# Altium PCB torqueDriver.PcbDoc
Units mm, origin at the board's own origin, x right, y up, seen from the top; angles counter-clockwise.
Board outline 152.4 x 101.6 mm, 2 copper layers (Top Layer, Bottom Layer); 37 components, 25 nets, 107 pads, 0 vias.
Unrouted connection lines stored in the file: 78.
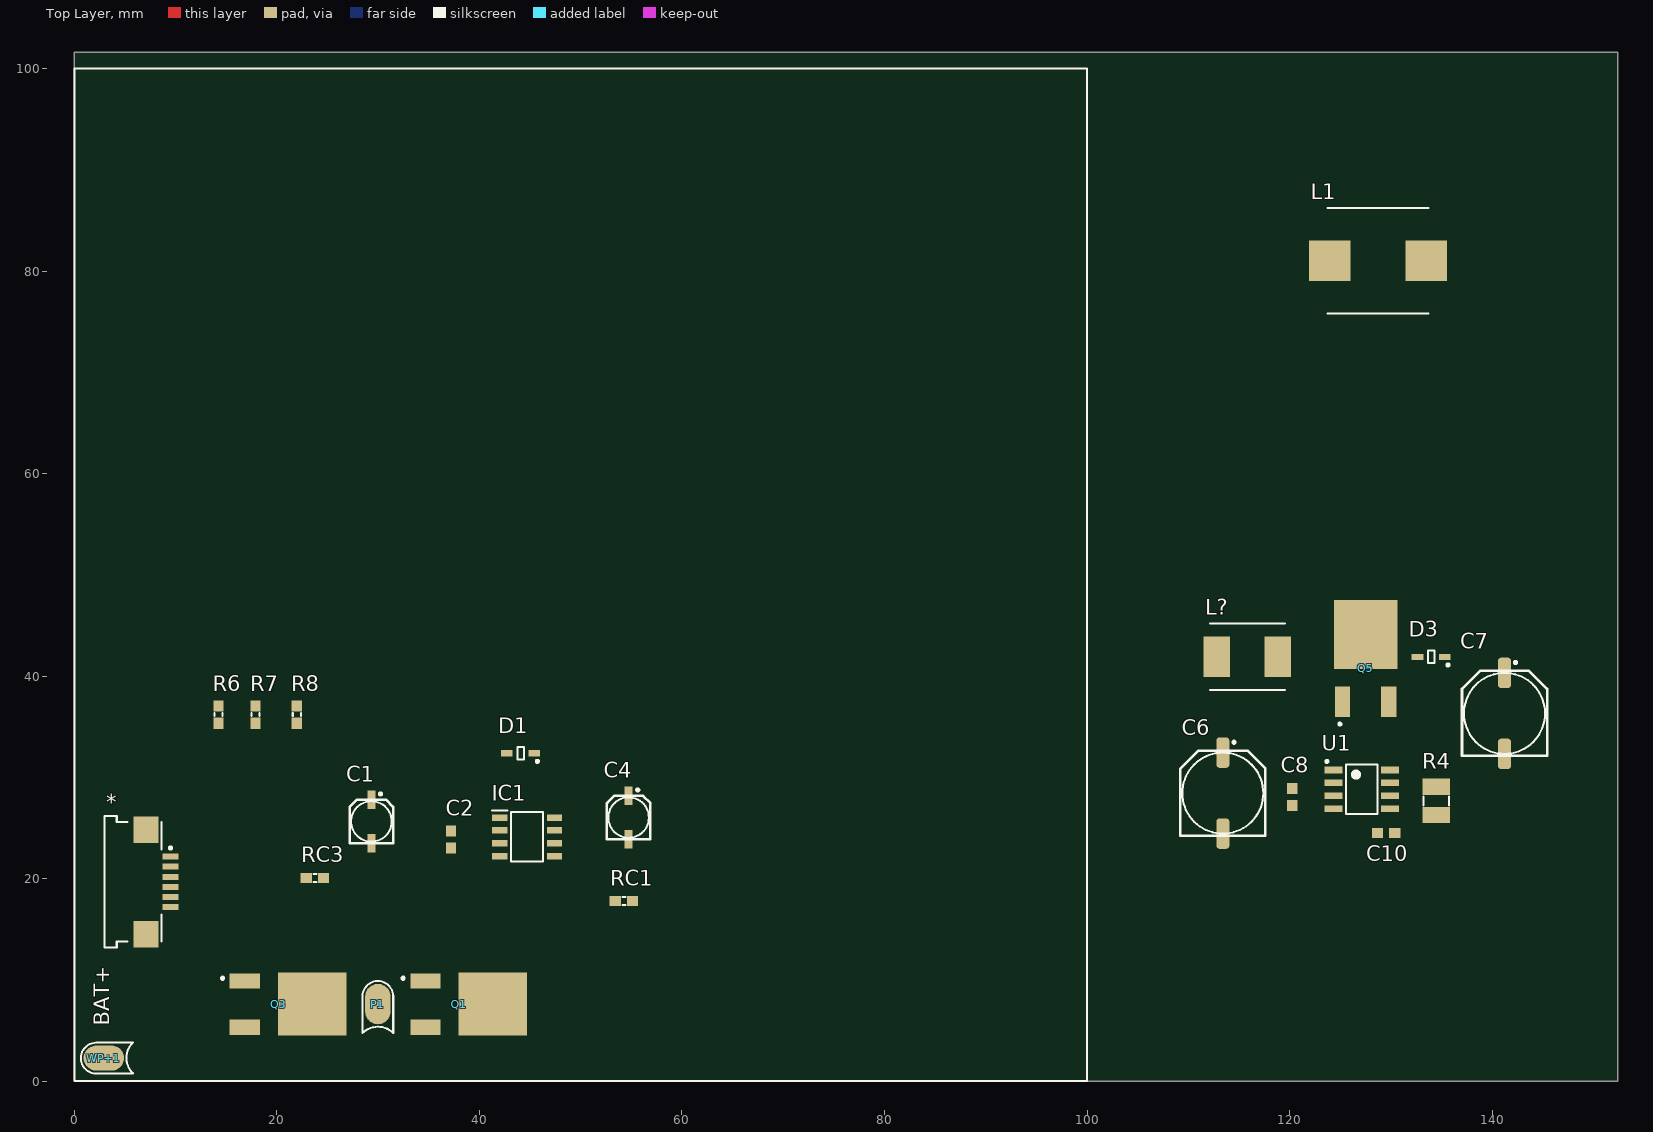
[diagram p0: Top Layer view]
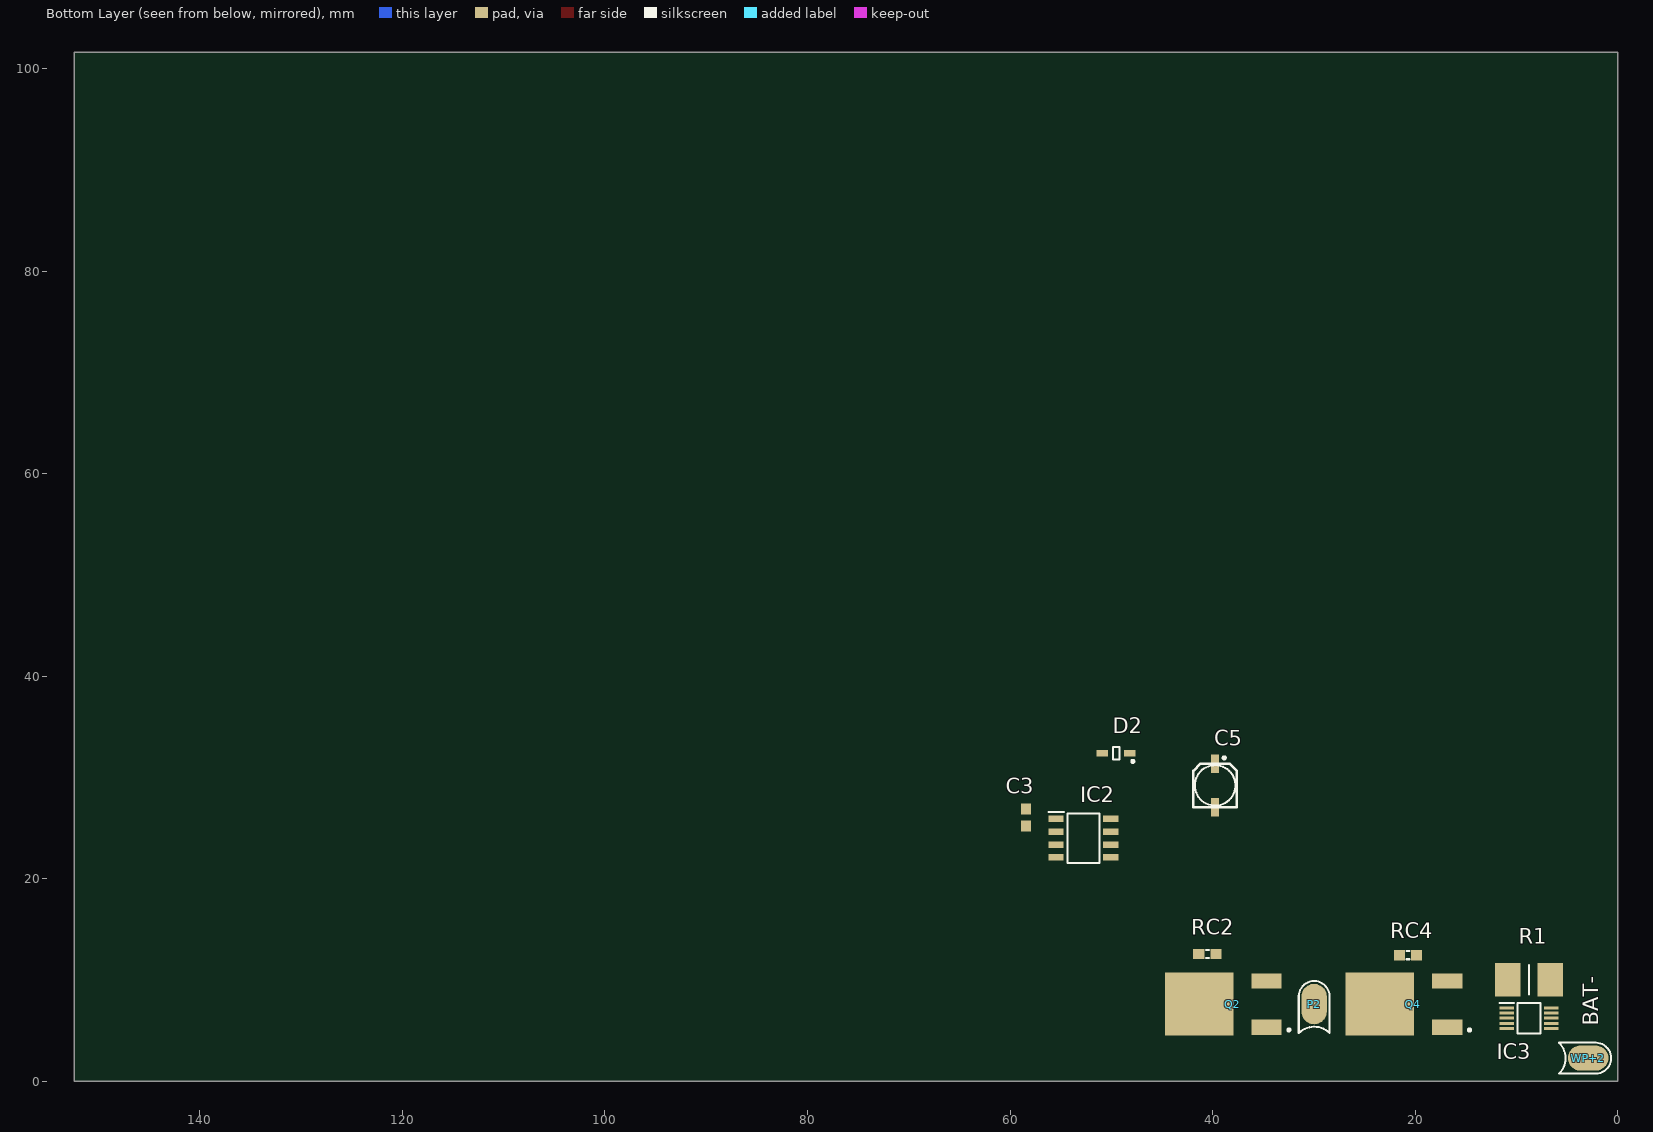
[diagram p1: Bottom Layer view, seen from below]

## Layer stack, top to bottom
Top Solder: solder mask 0.0102, Solder Resist, Dk 3.5
Top Layer: signal copper 0.0356
Dielectric 1: dielectric 0.32, FR-4, Dk 4.8
Bottom Layer: signal copper 0.0356
Bottom Solder: solder mask 0.0102, Solder Resist, Dk 3.5

## Board outline
0,0 152.4,0 152.4,101.6 0,101.6

## Design rules (kind name [scope] priority, off if disabled: settings)
Clearance [All] p1: gap=0.178 ignorepadtopadclearanceinfootprint=FALSE
PolygonConnect [All] p1: connectstyle=Relief reliefconductorwidth=0.254 reliefentries=4 polygonreliefangle="90 Angle" airgapwidth=0.254
RoutingVias [All] p1: holewidth=0.711 width=1.27 viastyle="Through Hole" minholewidth=0.711 minwidth=1.27 maxholewidth=0.711 maxwidth=1.27
SolderMaskExpansion [All] p1: expansion=0.102
Width [All] p1: maxlimit=0.254 minlimit=0.254 preferedwidth=0.254
30 further rules are at their usual default settings.

## Components (designator, comment, footprint, x,y, rotation, side; value= is the part's Value field where it differs from the comment)
* "HeaderFFC6p" FH12-6S-1.0SH 7.874,19.685 r270 top
C1 "47uF" CAPS4 29.337,25.654 r270 top
C2 "226" CAPC1608[0603] 37.211,23.876 r270 top
C3 "226" CAPC1608[0603] 58.42,26.035 r270 bottom
C4 "10uF" CAPS4 54.737,26.035 r270 top
C5 "10uF" CAPS4 39.751,29.21 r270 bottom
C6 "330uF" CAPS8 113.411,28.448 r270 top
C7 "330uF" CAPS8 141.224,36.322 r270 top
C8 "104" CAPC1608[0603] 120.269,28.067 r90 top
C10 "104" CAPC1608[0603] 129.54,24.511 r0 top
D1 "1N5819" SOD-323 44.069,32.385 r0 top
D2 "1N5819" SOD-323 49.53,32.385 r180 bottom
D3 "1N5819" SOD-323 133.985,41.91 r0 top
IC1 "IR2104S" SOIC127P600X175-8N 44.704,24.13 r0 top
IC2 "IR2104S" SOIC127P600X175-8N 52.75,24.003 r180 bottom
IC3 "INA381A2IDGSR" SOP50P490X110-10N 8.763,6.223 r180 bottom
L1 "100uH" WHC1040 128.727,81.026 r0 top
L? "22uH" WHC0630 115.824,41.91 r0 top
P1 "Motor+" WirePadSingleSide 57.322,7.62 r0 top
P2 "Motor-" WirePadSingleSide 2.622,7.62 r180 bottom
Q1 "NCE6075K 60V 75A" TO-252 37.973,7.62 r270 top
Q2 "NCE6075K 60V 75A" TO-252 37.973,7.62 r90 bottom
Q3 "NCE6075K 60V 75A" TO-252 20.142,7.62 r270 top
Q4 "NCE6075K 60V 75A" TO-252 20.142,7.62 r90 bottom
Q5 "NCE6020AK 60V 20A" TO-252 127.508,40.767 r0 top
R1 "R005 3W" R2512 8.763,10.033 r0 bottom
R4 "0.05" RESC3225[1210] 134.493,27.686 r270 top value=0.05R
R6 "47k" RESC1608[0603] 14.224,36.195 r270 top
R7 "47k" RESC1608[0603] 17.907,36.195 r270 top
R8 "47k" RESC1608[0603] 21.971,36.195 r270 top
RC1 "33R" RESC1608[0603] 54.268,17.78 r0 top
RC2 "33R" RESC1608[0603] 40.513,12.573 r180 bottom
RC3 "33R" RESC1608[0603] 23.749,20.066 r180 top
RC4 "33R" RESC1608[0603] 20.701,12.446 r180 bottom
U1 "MAX1771" SOIC8 127.127,28.829 r0 top
WP+1 "BAT+" WirePadSingleSide 2.921,29.636 r90 top
WP+2 "BAT-" WirePadSingleSide 2.921,-25.064 r270 bottom

## Footprints (in the part's own frame and the unit in brackets; to place one, negate y for a bottom-side part, rotate by r counter-clockwise, add the part's x,y. Pads: shape width x height; smd on the part's side, far side on the other; paste and mask are expansions set on the pad)
CAPC1608[0603] [mm] "Chip Capacitor, 2-Leads, Body 1.60x0.80mm, IPC Medium Density"
  rect 1.1x1 smd: 1(-0.85,0) 2(0.85,0)
  body extent -0.88,-0.48 0.87,0.47, height 0.85
CAPS4 [mm] "Solid Electorlytic Capacitor, B-type Footprint, 4mm Diameter, 5.5mm Height"
  rect 1.8x0.8 smd: 1(-2.15,0) 2(2.15,0)
  silkscreen extent -2.85,-2.15 2.15,2.15, body extent -2.29,-2.16 2.31,2.14, height 5.2
CAPS8 [mm] "Solid Electorlytic Capacitor, G-type Footprint, 8mm Diameter, 10mm Height"
  rrect50% 3x1.3 smd: 1(-4,0) 2(4,0)
  silkscreen extent -5.15,-4.2 4.2,4.2, body extent -3.5,-3.3 3.5,3.3, height 7.7
FH12-6S-1.0SH [mm] "Connector; FH12 Series; 6 Position; 1.0mm Spaced Bottom Eccentric Contact"
  rect 2.6x2.5 smd: 0(-5.156,-0.787) 0(5.156,-0.787)
  rect 0.6x1.6 smd: 1(-2.5,1.625) 2(-1.5,1.625) 3(-0.5,1.625) 4(0.5,1.625) 5(1.5,1.625) 6(2.5,1.625)
  silkscreen extent -6.5,-4.88 6.48,1.75, body extent -6.5,-4.89 6.5,1.91, height 2.8
R2512 [mm]
  rect 2.5x3.3 smd: 1(-2.1,0) 2(2.1,0)
  silkscreen extent 0,-1.45 0,1.45, body extent -3.15,-1.55 3.15,1.55, height 0.75
RESC1608[0603] [mm] "Chip Resistor, 2-Leads, Body 1.60x0.82mm, IPC Medium Density"
  rect 1.1x1 smd: 1(-0.85,0) 2(0.85,0)
  silkscreen extent -0.15,-0.4 0.15,0.4, body extent -0.8,-0.4 0.8,0.4, height 0.45
RESC3225[1210] [mm] "Chip Resistor, 2-Leads, Body 3.20x2.49mm, IPC Medium Density"
  rect 1.6x2.7 smd: 1(-1.4,0) 2(1.4,0)
  silkscreen extent -0.45,-1.25 0.45,1.25, body extent -1.68,-1.32 1.68,1.32, height 0.71
SOD-323 [mm] "SOD Diode;1.65mm W X 1.24mm L X 1.16mm H body"
  rect 1.15x0.6 smd: A(-1.35,0) K(1.35,0)
  silkscreen extent -0.33,-0.92 1.78,0.6, body extent -1.3,-0.65 1.3,0.65, height 1
SOIC8 [mm] "SOIC,1.27mm pitch;8 pin,3.90mm W X 4.88mm L X 1.73mm H body"
  rect 1.8x0.65 smd: 1(-2.8,1.905) 2(-2.8,0.635) 3(-2.8,-0.635) 4(-2.8,-1.905) 5(2.8,-1.905) 6(2.8,-0.635) 7(2.8,0.635) 8(2.8,1.905)
  silkscreen extent -3.57,-2.45 1.58,2.87, body extent -3.11,-2.45 3.11,2.45, height 1.75
SOIC127P600X175-8N [mm]
  rect 1.525x0.65 smd: 1(-2.712,1.905) 2(-2.712,0.635) 3(-2.712,-0.635) 4(-2.712,-1.905) 5(2.712,-1.905) 6(2.712,-0.635) 7(2.712,0.635) 8(2.712,1.905)
  silkscreen extent -3.47,-2.45 1.6,2.58, body extent -3,-2.45 3,2.45, height 1.75
SOP50P490X110-10N [mm]
  rect 1.4x0.3 smd: 1(-2.2,1) 2(-2.2,0.5) 3(-2.2,0) 4(-2.2,-0.5) 5(-2.2,-1) 6(2.2,-1) 7(2.2,-0.5) 8(2.2,0) 9(2.2,0.5) 10(2.2,1)
  silkscreen extent -2.9,-1.5 1.15,1.5, body extent -2.46,-1.5 2.46,1.5, height 1.1
TO-252 [mm]
  rect 1.5x3 smd: 1(-2.286,-3.3) 3(2.286,-3.3)
  rect 6.25x6.8 smd: 2(0,3.353)
  silkscreen extent -2.6,-5.55 -2.5,-5.45, body extent -3.3,-4.16 3.3,5.44, height 2.3
WHC0630 [mm] "7.4mm 6.6mm 3mm"
  rect 2.6x4 smd: 1(-3,0) 2(3,0)
  silkscreen extent -3.7,-3.3 3.7,3.3, body extent -3.66,-3.38 3.64,3.22, height 2.8
WHC1040 [mm] "11.6mm 10mm 4mm"
  rect 4.1x4 smd: 1(-4.75,0) 2(4.75,0)
  silkscreen extent -5,-5.2 5,5.2, body extent -5.55,-5 5.6,5, height 4
WirePadSingleSide [mm] "A single-side pad for soldering wire."
  oval 2.5x4 smd: 1(-27.35,0)
  silkscreen extent -28.87,-2.88 -25.83,2.27

## Part data
C1 C6 C7: library part "Cap Solid", "Polarized Capacitor (Radial)", Voltage=25V, Price(RMB)=0.000, Published=8-Jun-2000, Publisher="Altium Limited", Revision="July-2002: Re-released for DXP Platform."
C2 C3 C8 C10: library part "Cap Chip 1", "Chip Capacitor, PSpice Model", Tolerance=Y5V, Voltage=3V, Price(RMB)=0.000, Published=8-Jun-2000, Publisher="Altium Limited", Revision="July-2002: Re-released for DXP Platform."
C4 C5: library part "Cap Solid", "Polarized Capacitor (Radial)", Voltage=50V, Price(RMB)=0.000, Published=8-Jun-2000, Publisher="Altium Limited", Revision="July-2002: Re-released for DXP Platform."
D1 D2 D3: library part "Diode SOD", "MELF Diode", Voltage=1A40V, Imax=500mA, PartNumber=1N5819, Price(RMB)=0.000, Published=8-Jun-2000, Publisher="Altium Limited", Revision="July-2002: Re-released for DXP Platform."
IC1 IC2: "Integrated Circuit", Manufacturer_Name=Infineon, Datasheet Link=http://www.infineon.com/dgdl/ir2104.pdf?fileId=5546d462533600a4015355c7c1c31671, Height=1.75mm, Manufacturer_Part_Number=IR2104S
IC3: library part INA381A1IDGSR, "Integrated Circuit", Manufacturer_Name="Texas Instruments", Mouser Part Number=595-INA381A1IDGSR, Arrow Part Number=INA381A1IDGSR, Arrow Price/Stock=https://www.arrow.com/en/products/ina381a1idgsr/texas-instruments?region=nac, Datasheet Link=https://www.ti.com/lit/gpn/INA381, Height=1.1mm, Manufacturer_Part_Number=INA381A1IDGSR, Mouser Price/Stock=https://www.mouser.co.uk/ProductDetail/Texas-Instruments/INA381A1IDGSR?qs=rkhjVJ6%2F3EJisYwyX9Ekgg%3D%3D
L1 L?: library part L
P1 P2 WP+1 WP+2: library part "Wire Pad", "Wire soldering pad.", Price(RMB)=0.000
Q1 Q2 Q3 Q4 Q5: library part NMOS
R1: library part CR2512, "Resistor", Manufacturer_Name=Bourns, Manufacturer_Part_Number=CR2512-F/-1R00ELF, Mouser Part Number=652-CR2512-F/1R00ELF, Height=0.75mm, Mouser Price/Stock=https://www.mouser.co.uk/ProductDetail/Bourns/CR2512-F-1R00ELF?qs=W%2FMpXkg%252BdQ6b1PcPiGLK9Q%3D%3D
R4 R6 R7 R8 RC1 RC2 RC3 RC4: library part "Res Chip 2p 1", "Chip Resistor, PSpice Model, IPC PCB Library Drawing", Tolerance=5%, Price(RMB)=0.000, Published=8-Jun-2000, Publisher="Altium Limited", Revision="July-2002: Re-released for DXP Platform.", TC1=0, TC2=0
U1: "DC-to-DC Converter Control Circuit", PartNumber=MAX1771, Price(RMB)=0.0

## Nets (pads, with @x,y where several pads share a name; then routed paths per layer and width w, separated by ;. In a path a pad name is that pad's centre, name@x,y a point inside that pad or via, vN(x,y) a via of type N, cw(c..) or ccw(c..) an arc to the next point about the centre after c; other vN are vias at no path point)
12V: C1.1 C2.1 C3.1 C7.1 C8.1 D1.A D2.A D3.K IC1.1 IC2.1 U1.2
+3.3V: *.4 IC3.2 IC3.7
CS: Q5.3 R4.1 U1.8
currentOut: *.6 IC3.9
currentSense: IC3.1 Q3.3 Q4.3 R1.2
EXT: Q5.1 U1.1
GND: *.0 *.5 C1.2 C2.2 C3.2 C6.2 C7.2 C8.2 C10.1 IC1.4 IC2.4 IC3.4 IC3.5 IC3.8 IC3.10 R1.1 R4.2 R6.1 R7.1 R8.1 U1.3 U1.4 U1.6 U1.7 WP+2.1
IN1: *.2 IC1.2 R6.2
IN2: *.1 IC2.2 R7.2
Motor1: C4.2 IC1.6 P1.1 Q1.3 Q3.2
Motor2: C5.2 IC2.6 P2.1 Q2.3 Q4.2
NetC4_1: C4.1 D1.K IC1.8
NetC5_1: C5.1 D2.K IC2.8
NetC10_2: C10.2 U1.5
NetD3_A: D3.A L1.1 Q5.2
NetIC1_5: IC1.5 RC3.1
NetIC1_7: IC1.7 RC1.1
NetIC2_5: IC2.5 RC4.1
NetIC2_7: IC2.7 RC2.1
NetQ1_1: Q1.1 RC1.2
NetQ2_1: Q2.1 RC2.2
NetQ3_1: Q3.1 RC3.2
NetQ4_1: Q4.1 RC4.2
Power+: C6.1 L1.2 Q1.2 Q2.2 WP+1.1
SD: *.3 IC1.3 IC2.3 R8.2
pads on no net: IC3.3 IC3.6 L?.1 L?.2

## Silkscreen, mask and mechanical layers (free items; w line width, h text height)
Top Overlay:
  lines w0.2: 0,0 0,100 100,100 100,0 0,0